# Altium PCB PCB1.PcbDoc
Units mil, origin at the board's own origin, x right, y up, seen from the top; angles counter-clockwise.
Board outline 3130 x 2050 mil, 2 copper layers (Top Layer, Bottom Layer); 20 components, 8 nets, 38 pads, 0 vias.
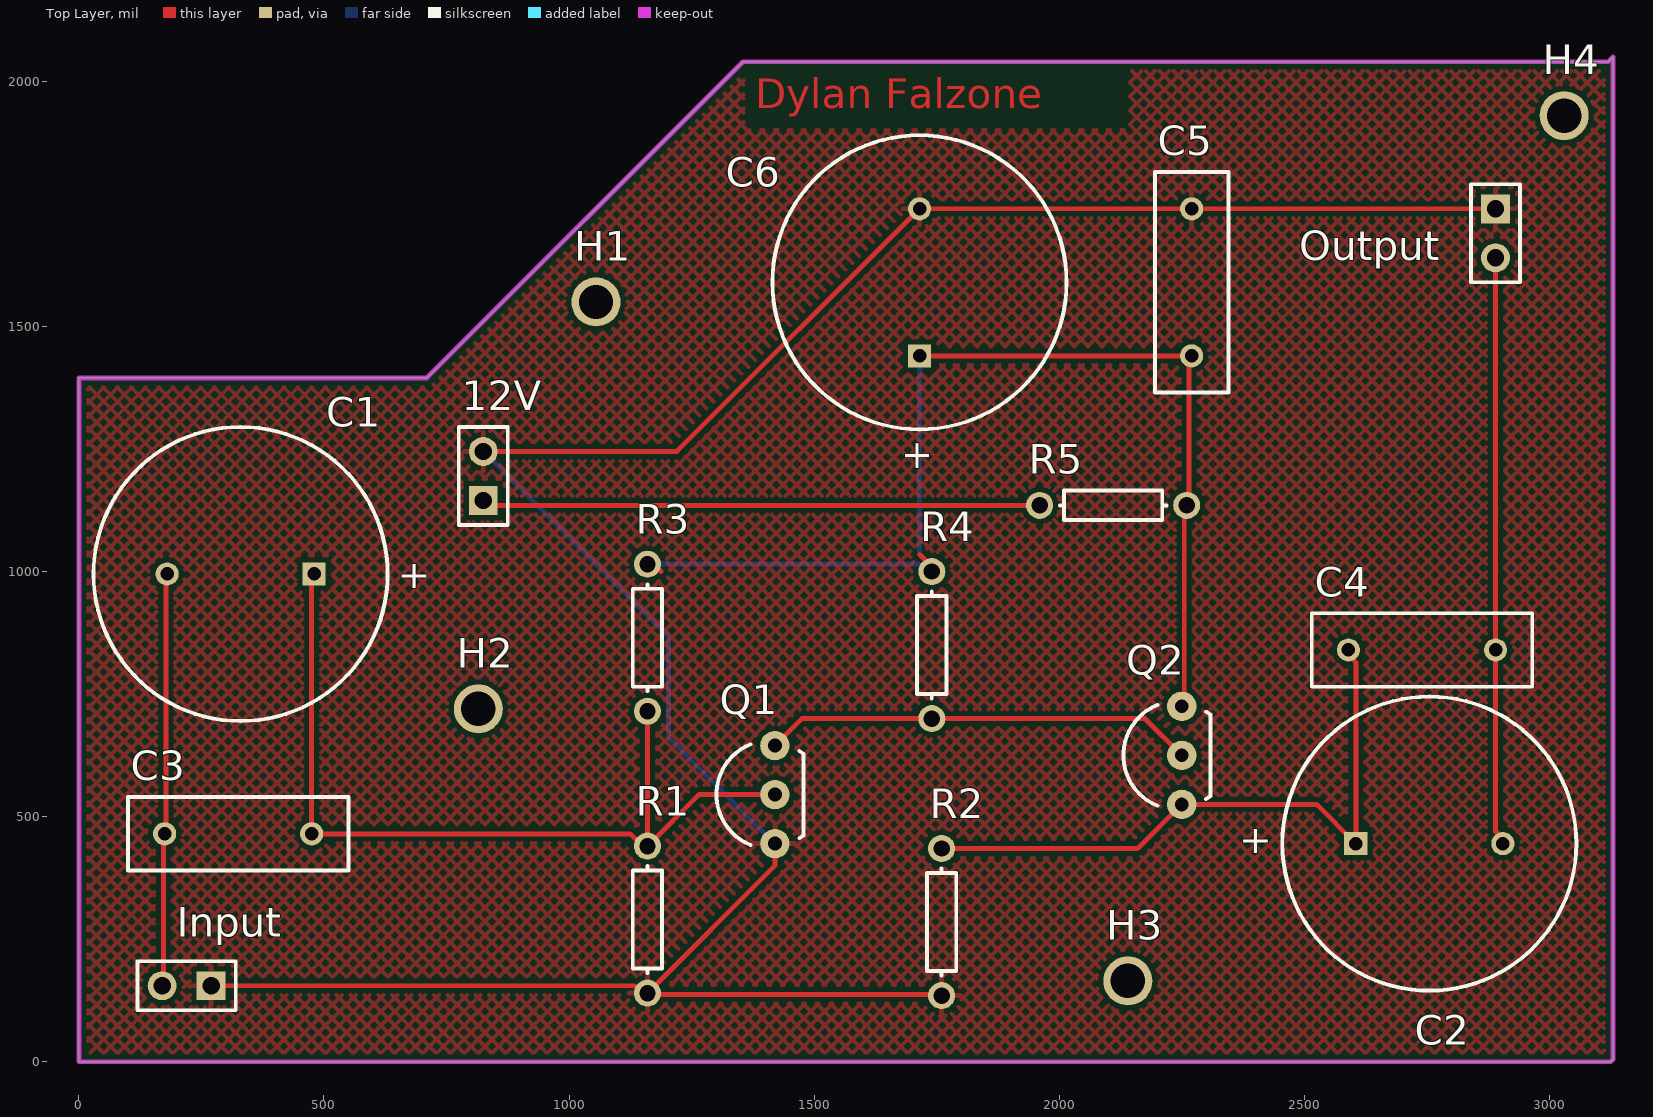
[diagram p0: Top Layer view]
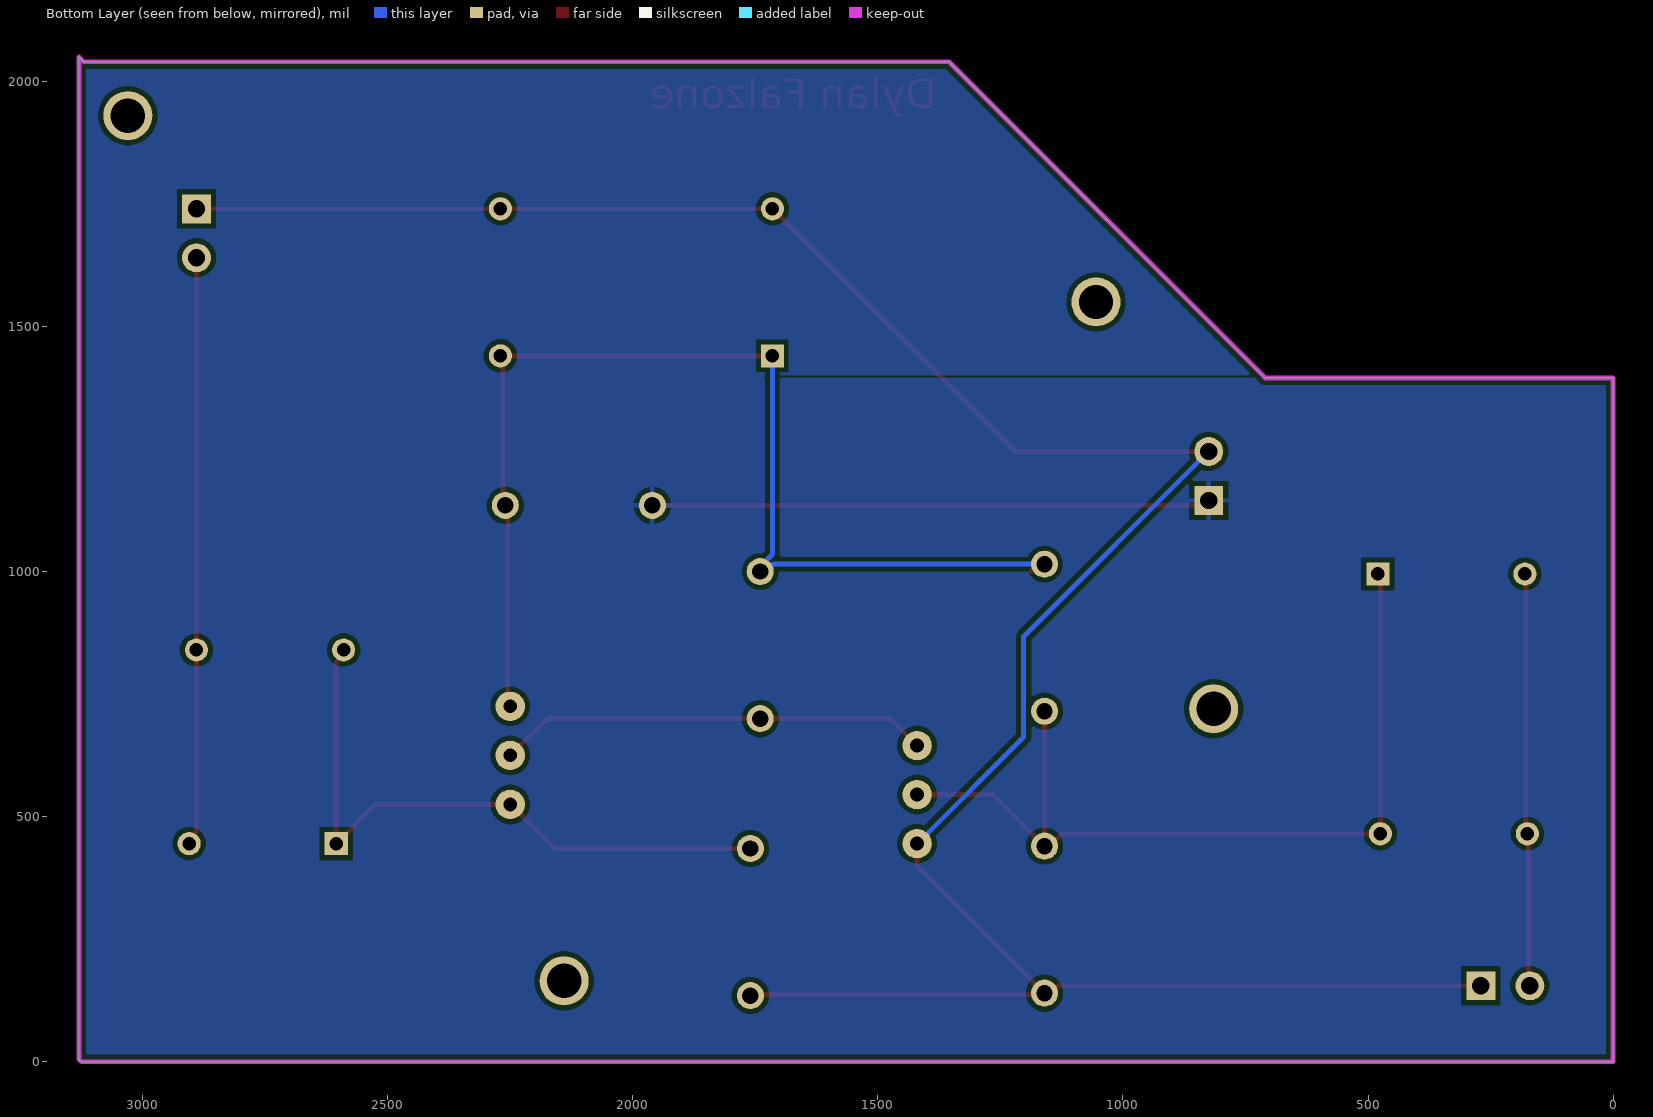
[diagram p1: Bottom Layer view, seen from below]

## Layer stack, top to bottom
Top Solder: solder mask 0.4, Solder Resist, Dk 3.5
Top Layer: signal copper 1.4
Dielectric 1: dielectric 12.6, FR-4, Dk 4.8
Bottom Layer: signal copper 1.4
Bottom Solder: solder mask 0.4, Solder Resist, Dk 3.5

## Board outline
0,0 0,1395 710,1395 1355,2040 3120,2040 3130,2050 3130,5 3125,0

## Design rules (kind name [scope] priority, off if disabled: settings)
Clearance [All] p1: gap=10 ignorepadtopadclearanceinfootprint=FALSE except(0: Arc-Hole Track-Hole SMDPad-Hole THPad-Hole Via-Hole Fill-Hole Poly-Hole Region-Hole Text-Hole)
PolygonConnect [All] p1: connectstyle=Relief reliefconductorwidth=10 reliefentries=4 polygonreliefangle="90 Angle" airgapwidth=10
RoutingVias [All] p1: holewidth=28 width=50 viastyle="Through Hole" minholewidth=28 minwidth=50 maxholewidth=28 maxwidth=50
SolderMaskExpansion [All] p1: expansion=4 istentingtop=FALSE
Width [All] p1: maxlimit=10 minlimit=10 preferedwidth=10
30 further rules are at their usual default settings.

## Components (designator, comment, footprint, x,y, rotation, side; value= is the part's Value field where it differs from the comment)
12V "Header 2" HDR1X2 825,1145 r90 top
C1 "Cap Pol1" RB7.6-15 330,995 r0 top value=100uF
C2 "Cap Pol1" RB7.6-15 2755,445 r180 top value=100uF
C3 "Cap" RAD-0.3 325,465 r0 top value=100nF
C4 "Cap" RAD-0.3 2740,840 r180 top value=100nF
C5 "Cap" RAD-0.3 2270,1590 r270 top value=100nF
C6 "Cap Pol1" RB7.6-15 1715,1590 r270 top value=100uF
H1 "Hole 3mm" "Hole 3mm" 1445,1375 r0 top
H2 "Hole 3mm" "Hole 3mm" 1205,545 r0 top
H3 "Hole 3mm" "Hole 3mm" 2530,-10 r0 top
H4 "Hole 3mm" "Hole 3mm" 3420,1755 r0 top
Input "Header 2" HDR1X2 270,155 r180 top
Output "Header 2" HDR1X2 2890,1740 r270 top
Q1 "2N3904" TO92C 1420,445 r180 top
Q2 "2N3904" TO92C 2250,525 r180 top
R1 "Res1" AXIAL-0.3 1160,290 r90 top value=1K
R2 "Res1" AXIAL-0.3 1760,285 r90 top value=1K
R3 "Res1" AXIAL-0.3 1160,865 r90 top value=1K
R4 "Res1" AXIAL-0.3 1740,850 r90 top value=1K
R5 "Res1" AXIAL-0.3 2110,1135 r180 top value=1K

## Footprints (in the part's own frame and the unit in brackets; to place one, negate y for a bottom-side part, rotate by r counter-clockwise, add the part's x,y. Pads: shape width x height; smd on the part's side, far side on the other; paste and mask are expansions set on the pad)
AXIAL-0.3 [mm] "Axial Device, Thru-Hole; 2 Leads; 0.3 in Pin Spacing"
  round 1.4 hole 0.85: 1(-3.81,0) 2(3.81,0)
  silkscreen extent -2.77,-0.76 2.77,0.76
HDR1X2 [mm] "Connector; Header; 2 Position"
  rect 1.5x1.5 hole 0.9: 1(0,0)
  round 1.5 hole 0.9: 2(2.54,0)
  silkscreen extent -1.27,-1.27 3.81,1.27
"Hole 3mm" [mil]
  round 100 hole 70: 1(-390,175)
RAD-0.3 [mm] "Radial Cap, Thru-Hole; 2 Leads; 0.3 in Pin Spacing"
  round 1.2 hole 0.7: 1(-3.81,0) 2(3.81,0)
  silkscreen extent -5.71,-1.91 5.71,1.91
RB7.6-15 [mm] "Polarized Capacitor (Radial); 2 Leads"
  rect 1.2x1.2 hole 0.7: 1(3.81,0)
  round 1.2 hole 0.7: 2(-3.81,0)
  silkscreen extent -7.62,-7.62 7.62,7.62
TO92C [mil]
  round 60 hole 28: 1(0,0) 2(0,-100) 3(0,-200)
  silkscreen extent -58,-203 119,3

## Part data
12V Input Output: "Header, 2-Pin", LatestRevisionDate=17-Jul-2002, LatestRevisionNote="Re-released for DXP Platform.", Publisher="Altium Limited"
C1 C2 C6: "Polarized Capacitor (Radial)", LatestRevisionDate=17-Jul-2002, LatestRevisionNote="Re-released for DXP Platform.", PackageDescription="Polarized Capacitor (Radial); 2 Leads", PackageReference=RB7.6-15, Published=8-Jun-2000, Publisher="Altium Limited"
C3 C4 C5: "Capacitor", LatestRevisionDate=17-Jul-2002, LatestRevisionNote="Re-released for DXP Platform.", PackageDescription="Radial Cap, Thru-Hole; 2 Leads; 0.3 in Pin Spacing", PackageReference=RAD-0.3, Published=8-Jun-2000, Publisher="Altium Limited"
Q1 Q2: "NPN General Purpose Amplifier", ComponentLink1Description="Manufacturer Link", ComponentLink1URL=http://www.fairchildsemi.com/, ComponentLink2Description=Datasheet, ComponentLink2URL=http://www.fairchildsemi.com/ds/2N%2F2N3904.pdf, DatasheetVersion=1997, LatestRevisionDate=15-Jan-2003, LatestRevisionNote="PCB Footprint 'BCY-W3/D4.7' replaced", PackageDescription="TO, Flat Index; 3 In-Line, Axial Leads; Body Dia. 4.5mm; Leads 0.51 x 0.48 mm (max)", PackageReference=TO-92A, PackageVersion=Sep-1998, Published=8-Jun-2000, Publisher="Altium Limited"
R1 R2 R3 R4 R5: "Resistor", LatestRevisionDate=17-Jul-2002, LatestRevisionNote="Re-released for DXP Platform.", PackageDescription="Axial Device, Thru-Hole; 2 Leads; 0.3 in Pin Spacing", PackageReference=AXIAL-0.3, Published=8-Jun-2000, Publisher="Altium Limited"

## Nets (pads, with @x,y where several pads share a name; then routed paths per layer and width w, separated by ;. In a path a pad name is that pad's centre, name@x,y a point inside that pad or via, vN(x,y) a via of type N, cw(c..) or ccw(c..) an arc to the next point about the centre after c; other vN are vias at no path point)
GND: 12V.2 C5.1 C6.2 Input.1 Output.1 Q1.1 R1.1 R2.1 | length 5227.5
  Top Layer w10: Input.1 1132.79,155 1147.79,140 R1.1 ; 12V.2 1220,1245 C6.2 C5.1 Output.1 ; Q1.1 1420,400 R1.1 ; R2.1 1757.5,137.5 1162.5,137.5 R1.1
  Bottom Layer w10: 12V.2 1202.56,867.44 1202.56,662.44 Q1.1
Net12V_1: 12V.1 R5.2 | length 1139.1
  Top Layer w10: 12V.1 835,1135 R5.2
NetC1_1: C1.1 C3.2 Q1.2 R1.2 R3.1 | length 1805.9
  Top Layer w10: C1.1 475,990 C3.2 1124.81,465 1149.81,440 R1.2 ; R3.1 R1.2 ; Q1.2 1265,545 R1.2
NetC1_2: C1.2 C3.1 Input.2 | length 844.1
  Top Layer w10: Input.2 172.5,157.5 172.5,462.5 C3.1 177.5,467.5 177.5,992.5 C1.2
NetC2_1: C2.1 C4.2 Q2.1 R2.2 | length 1316.6
  Top Layer w10: R2.2 2160,435 Q2.1 2525,525 C2.1 2605,814.92 2590,829.92 C4.2
NetC2_2: C2.2 C4.1 Output.2 | length 1201.2
  Top Layer w10: Output.2 C4.1 2890,470.08 2905,455.08 C2.2
NetC5_2: C5.2 C6.1 Q2.3 R3.2 R4.2 R5.1 | length 2393.8
  Top Layer w10: R3.2 1172.21,1015 1187.21,1000 ; 1715,1035.19 1740,1010.19 R4.2 ; C6.1 C5.2 2265,1435 2265,1140 R5.1 2255,1130 2255,730 Q2.3
  Bottom Layer w10: R3.2 1712.79,1015 1727.79,1000 R4.2 1740,1010.19 1715,1035.19 C6.1
NetQ1_3: Q1.3 Q2.2 R4.1 | length 883.8
  Top Layer w10: Q1.3 1475,700 R4.1 2175,700 Q2.2
pads on no net: H1.1 H2.1 H3.1 H4.1

## Polygon pours and split planes (outlines as drawn)
Net12V_1 on Bottom Layer "NET12V_1_L02_P002" (solid, pour order 2): 0,0 0,1395 1735,1395 3125,5 3130,10 3130,2040 1355,2040 715,1400 1730,1400 3125,5
GND on Top Layer "GND_L01_P007" (hatched 45Degree grid 20 track 8, pour order 7): 0,0 -5,5 -5,1395 3130,1395 3125,1390 3125,0
GND on Top Layer "GND_L01_P008" (hatched 45Degree grid 20 track 8, pour order 8): 715,1390 715,1395 1365,2045 3130,2045 3130,1395
GND on Top Layer "GND_L01_P006" (hatched Horizontal grid 20 track 8, pour order 6): 0,0
GND on Top Layer "GND_L01_P004" (hatched Horizontal grid 20 track 8, pour order 4): 10,0 3125,0 1350,0

## Keep-outs
Keep-Out Layer:
  the board outline again, w10

## Other copper
Top Layer:
  text "Dylan Falzone" at 1380,1944.99 h60

## Text inside footprints (layer, text, board x,y; h text height)
C1: Top Overlay "+" at 650.15,965.99 h59.06
C2: Top Overlay "+" at 2434.85,474.01 h59.06 r180
C6: Top Overlay "+" at 1685.99,1269.85 h59.06 r270